# Altium PCB ScopeVideo.PcbDoc
Units mil, origin at the board's own origin, x right, y up, seen from the top; angles counter-clockwise.
Board outline 2000 x 1500 mil, 2 copper layers (Top Layer, Bottom Layer); 23 components, 10 nets, 55 pads, 3 vias.
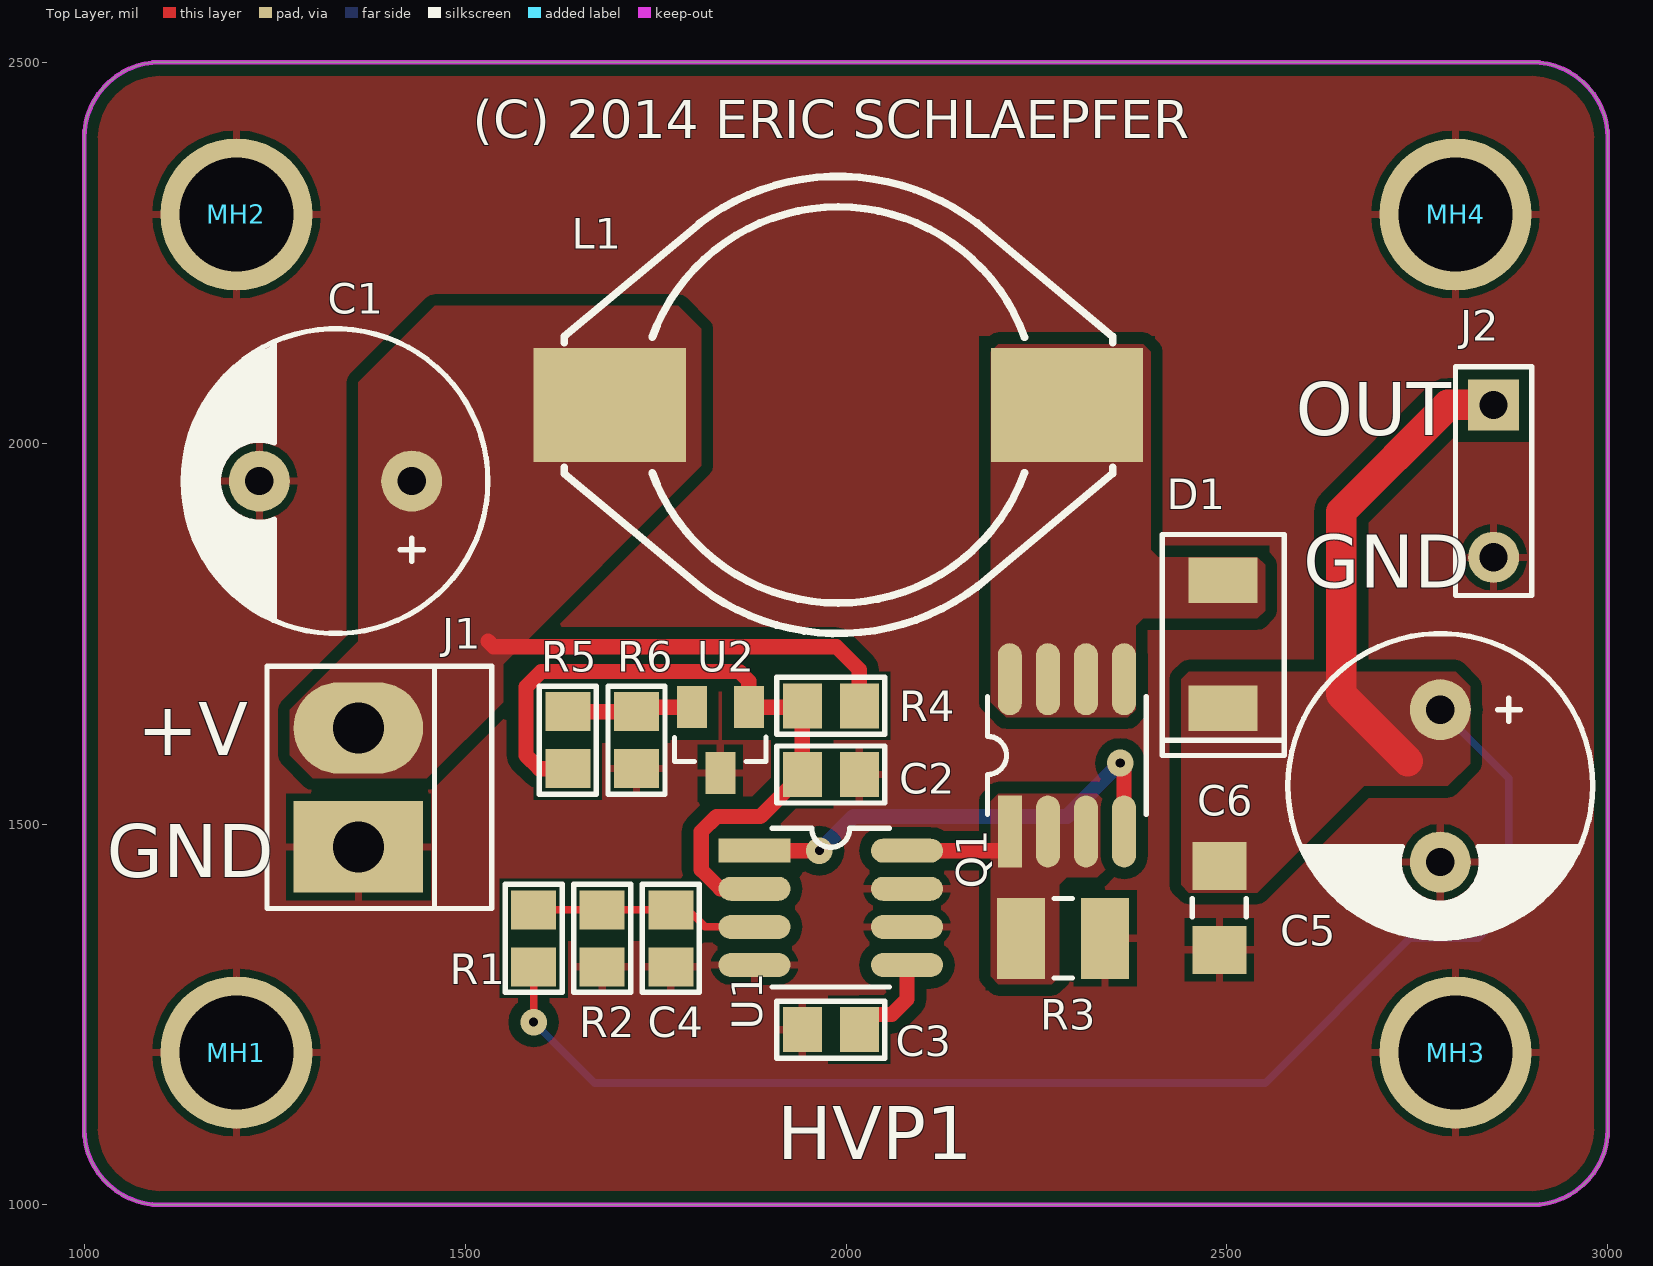
[diagram p0: Top Layer view]
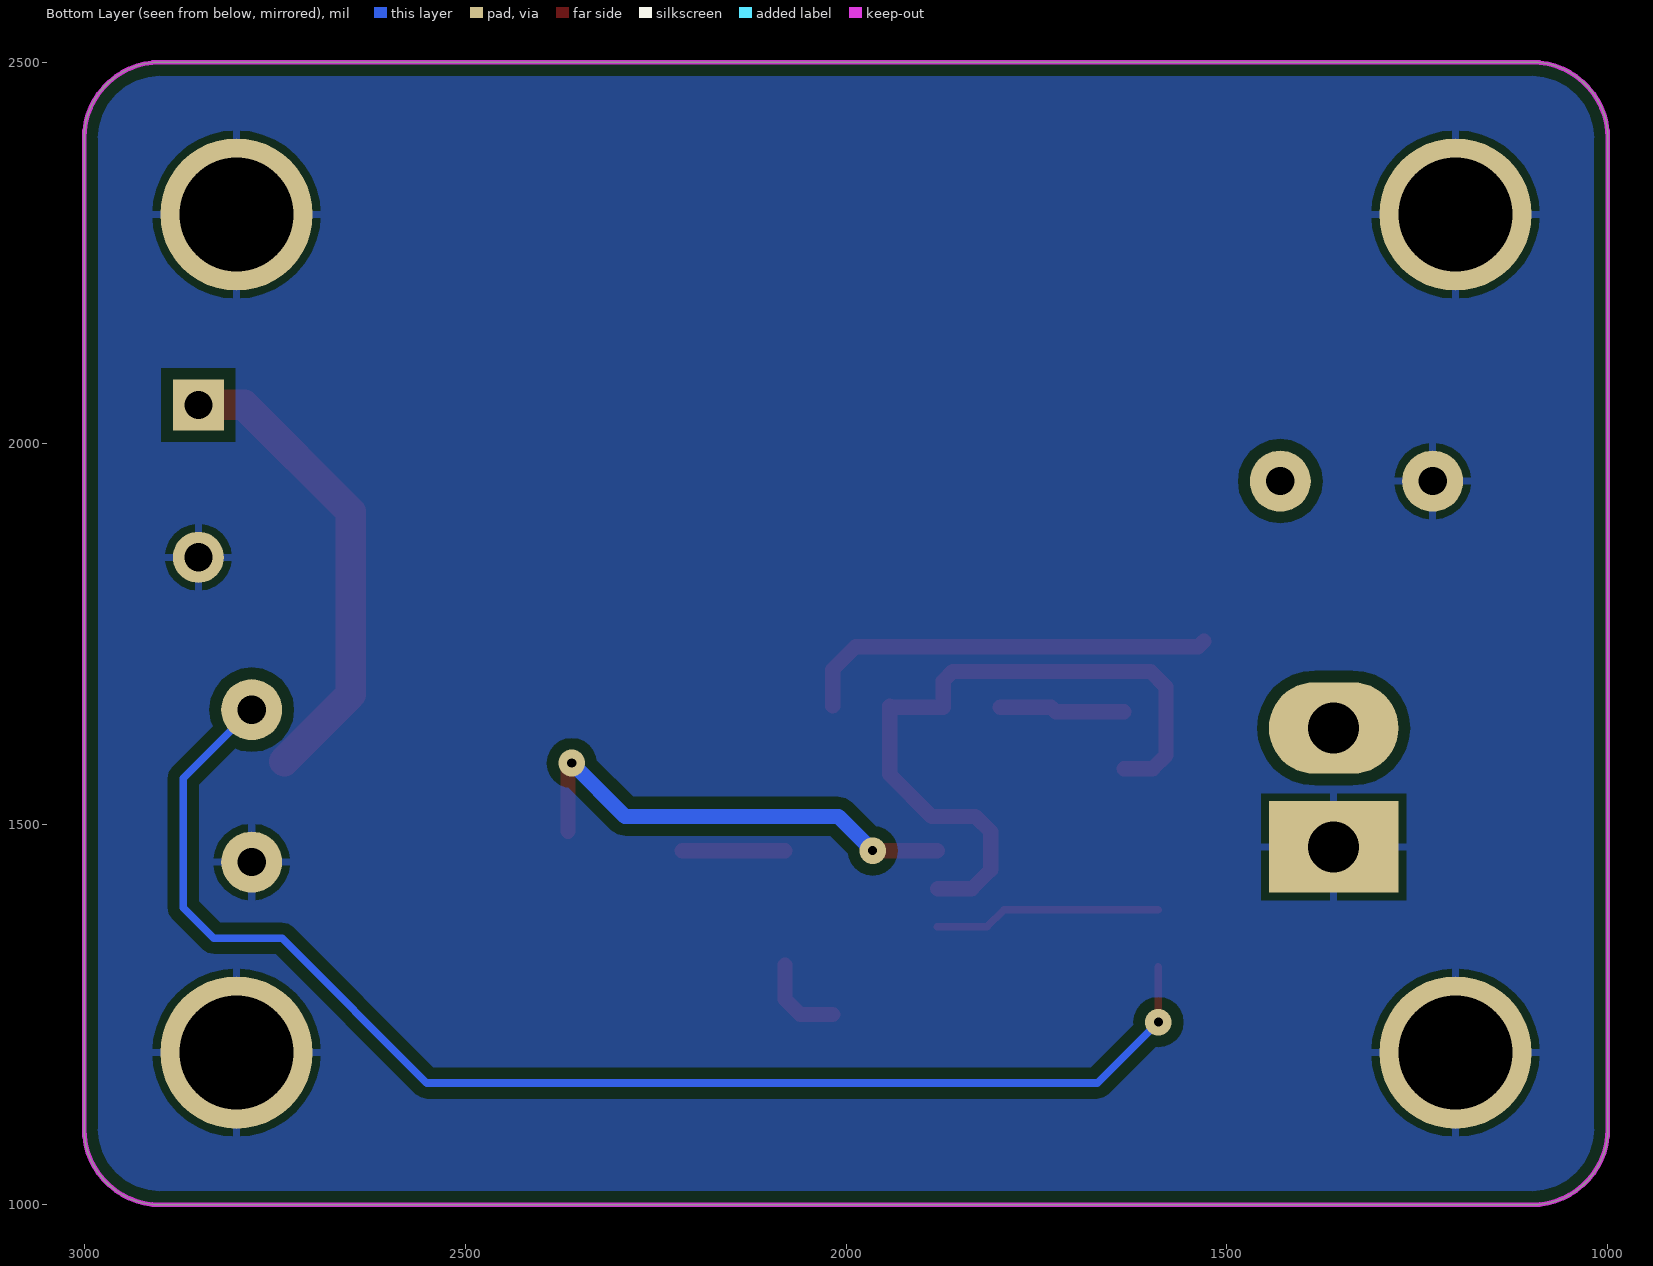
[diagram p1: Bottom Layer view, seen from below]

## Layer stack, top to bottom
Top Solder: solder mask 0.4, Solder Resist, Dk 3.5
Top Layer: signal copper 1.4
Dielectric 1: dielectric 12.6, FR-4, Dk 4.8
Bottom Layer: signal copper 1.4
Bottom Solder: solder mask 0.4, Solder Resist, Dk 3.5

## Board outline
1000,1100 1000,2400 cw(c1100,2400) 1100,2500 2900,2500 cw(c2900,2400) 3000,2400 3000,1100 cw(c2900,1100) 2900,1000 1100,1000 cw(c1100,1100) 1000,1100

## Design rules (kind name [scope] priority, off if disabled: settings)
Clearance [InPolygon] p1: gap=15
Clearance Clearance_1 [All] p2: gap=8
HoleSize [All] p1: absolutevalues=TRUE maxlimit=200 minlimit=12 maxpercent=80.000 minpercent=20.000
PolygonConnect PolygonConnect_1 [InNet('NetQ1_1') or InNet('NetD1_A') or InNet('NetC5_1') or InNet('NetC1_1')] p1: connectstyle=Direct reliefconductorwidth=10 reliefentries=4 polygonreliefangle="90 Angle" airgapwidth=10
PolygonConnect [All] p2: connectstyle=Relief reliefconductorwidth=10 reliefentries=4 polygonreliefangle="90 Angle" airgapwidth=10
RoutingVias [All] p1: holewidth=12 width=35 viastyle="Through Hole" minholewidth=12 minwidth=35 maxholewidth=28 maxwidth=50
SolderMaskExpansion [All] p1: expansion=4
Width [All] p1: maxlimit=100 minlimit=8 preferedwidth=10 minimp=50.000000 maximp=50.000000 favimp=50.000000
28 further rules are at their usual default settings.

## Classes and differential pairs
component class ScopeVideo: C1 C2 C3 C4 C5 C6 D1 J1 J2 L1 Q1 Q15 R1 R2 R3 R4 R5 R6 U1 U2

## Components (designator, comment, footprint, x,y, rotation, side; value= is the part's Value field where it differs from the comment)
C1 "Cap Pol2" CAP_R200x400 1330,1950 r180 top
C2 "Cap" G_0805[2012] 1980,1565 r180 top
C3 "Cap" G_0805[2012] 1980,1230 r0 top
C4 "Cap" G_0805[2012] 1770,1350 r90 top
C5 "TBD" CAP_R200x400 2780,1550 r270 top
C6 "Cap" G_1206[3216] 2490,1390 r90 top
D1 "MURA240T3G" G_SMB 2495,1820 r270 top
J1 "12V" HDR2S156 1360,1470 r180 top
J2 "OUT" HDR3SM1 2850,2050 r0 top
L1 "PM5022 68uH" IND1 1690,2050 r0 top
MH1 "Comment" M_MTHOLE 1200,1200 r0 top
MH2 "Comment" M_MTHOLE 1200,2300 r0 top
MH3 "Comment" M_MTHOLE 2800,1200 r0 top
MH4 "Comment" M_MTHOLE 2800,2300 r0 top
Q1 "SI4434DY-T1-E3" G_SO8 2290,1590 r90 top
R1 "Res1" G_0805[2012] 1590,1350 r90 top
R2 "Res1" G_0805[2012] 1680,1350 r270 top
R3 "Res1" G_1210[3225] 2285,1350 r0 top
R4 "Res1" G_0805[2012] 1980,1655 r180 top
R5 "Res1" G_0805[2012] 1635,1610 r90 top
R6 "Res1" G_0805[2012] 1725,1610 r270 top
U1 "MAX1771" G_SO8 1980,1390 r0 top
U2 "ZTL431A" G_SOT23 1835,1610 r180 top

## Footprints (in the part's own frame and the unit in brackets; to place one, negate y for a bottom-side part, rotate by r counter-clockwise, add the part's x,y. Pads: shape width x height; smd on the part's side, far side on the other; paste and mask are expansions set on the pad)
CAP_R200x400 [mil]
  round 80 hole 37: 1(-100,0) 2(100,0)
  silkscreen extent -200,-200 200,200, body extent -200,-200 200,200, height 800
G_0805[2012] [mm] "Generic 0805"
  rect 1.3x1.5 smd: 1(-0.95,0) 2(0.95,0)
  silkscreen extent -1.8,-0.95 1.8,0.95, body extent -1,-0.6 1,0.6
G_1206[3216] [mm] "Generic 1206"
  rect 1.6x1.8 smd: 1(-1.4,0) 2(1.4,0)
  silkscreen extent -0.3,-0.9 0.3,0.9, body extent -1.6,-0.8 1.6,0.8
G_1210[3225] [mm] "Generic 1210"
  rect 1.6x2.7 smd: 1(-1.4,0) 2(1.4,0)
  silkscreen extent -0.3,-1.33 0.3,1.33, body extent -1.61,-1.25 1.61,1.25
G_SMB [mm]
  rect 1.52x2.3 smd: A(0,0) K(4.27,0)
  silkscreen extent -1.52,-2.03 5.84,2.03
G_SO8 [mm]
  rect 2.4x0.8 smd: 1(-2.54,1.905)
  oval 2.4x0.8 smd: 2(-2.54,0.635) 3(-2.54,-0.635) 4(-2.54,-1.905) 5(2.54,-1.905) 6(2.54,-0.635) 7(2.54,0.635) 8(2.54,1.905)
  silkscreen extent -1.96,-2.64 1.96,2.65, body extent -2.03,-2.54 2.03,2.54
G_SOT23 [mm]
  rect 1x1.4 smd: 1(-0.95,-1.1) 2(0.95,-1.1) 3(0,1.1)
  silkscreen extent -1.52,-0.1 1.52,0.71, body extent -1.45,-0.64 1.45,0.64
HDR2S156 [mil]
  rect 170x120 hole 67: 1(0,0)
  oval 170x120 hole 67: 2(0,-156)
  silkscreen extent -175,-237 120,81, body extent -194,-231 200,75, height 585
HDR3SM1 [mil]
  rect 67x67 hole 37: 1(0,0)
  round 67 hole 37: 2(0,-200)
  silkscreen extent -50,-250 50,50
IND1 [mil]
  rect 200x150 smd: 1(0,0) 2(600,0)
  silkscreen extent -60,-300 660,300, body extent -60,-300 660,300
M_MTHOLE [mil]
  round 200 hole 150: 1(0,0)

## Part data
C1 C5: library part CapP, "Polarized Capacitor"
C2 C3 C4 C6: "Capacitor"
D1: library part "D Schottky", "Schottky Diode"
J1 J2: library part CON2, "Connector, 2 pin"
L1: library part INDUCTOR, "Inductor"
Q1: library part "MOSFET N SO8", "N-channel MOSFET (8-SOIC)"
R1 R2 R3 R4 R5 R6: library part Res, "Resistor"
U1: "MAX1771 Boost Converter"
U2: library part TL431, "Adjustable Shunt Reg"

## Via types
v1: diameter 35, hole 12, Top Layer to Bottom Layer, 3 vias

## Nets (pads, with @x,y where several pads share a name; then routed paths per layer and width w, separated by ;. In a path a pad name is that pad's centre, name@x,y a point inside that pad or via, vN(x,y) a via of type N, cw(c..) or ccw(c..) an arc to the next point about the centre after c; other vN are vias at no path point)
GND: C1.2 C2.1 C3.1 C4.1 C5.2 C6.1 J1.1 J2.2 MH1.1 MH2.1 MH3.1 MH4.1 R2.2 R3.2 R6.2 U1.4 U1.6 U1.7 U2.3
NetC1_1: C1.1 J1.2 L1.1 R4.1 | length 550.5
  Top Layer w20: 1530,1740 1537.4,1732.6 1987.4,1732.6 2017.4,1702.6 R4.1
NetC2_2: C2.2 R4.2 R5.1 U1.2 U2.1 | length 947.2
  Top Layer w20: R5.1 1597.4,1572.6 1580,1590 1580,1680 1600,1700 1860,1700 1872.4,1687.6 U2.1 1940.91,1653.31 R4.2 C2.2 1887.6,1510 1830,1510 1810,1490 1810,1440 1835,1415 U1.2
NetC3_2: C3.2 U1.5 | length 115.9
  Top Layer w20: C3.2@2017.4,1250 2060,1250 2080,1270 U1.5
NetC4_2: C4.2 R1.2 R2.1 U1.3 | length 299.3
  Top Layer w10: R1.2 R2.1 C4.2 1792.6,1387.4 1815,1365 U1.3
NetC5_1: C5.1 C6.2 D1.K J2.1 R1.1 | length 2400
  Top Layer w10: v1(1590,1240) R1.1
  Top Layer w40: 2737.5,1582.5 2650,1670 2650,1910 2790,2050 J2.1
  Bottom Layer w10: v1(1590,1240) 1670,1160 2550,1160 2740,1350 2830,1350 2870,1390 2870,1560 C5.1
NetD1_A: D1.A L1.2 Q1.5 Q1.6 Q1.7 Q1.8
NetQ1_1: Q1.1 Q1.2 Q1.3 R3.1 U1.8 | length 135
  Top Layer w20: U1.8 Q1.1@2215,1465
NetQ1_4: Q1.4 U1.1 | length 619.7
  Top Layer w20: U1.1 v1(1965,1465) ; v1(2360,1580) 2365,1575 Q1.4
  Bottom Layer w20: v1(1965,1465) 2010,1510 2290,1510 v1(2360,1580)
NetR5_2: R5.2 R6.1 U2.2 | length 165
  Top Layer w20: R5.2 R6.1 1730.91,1653.31 U2.2

## Polygon pours and split planes (outlines as drawn)
NetC5_1 on Top Layer "OUT" (solid, pour order 6): 2440,1420 2450,1410 2540,1410 2680,1550 2790,1550 2819.23,1579.23 2819.23,1680.77 2800,1700 2450,1700 2440,1690
GND on Top Layer "GND_TOP" (solid, pour order 10): 1000,2500 3000,2500 3000,1000 1000,1000 1000,2500
NetD1_A on Top Layer "FET_D" (solid, pour order 4): 2210,1640 2200,1650 2190,1660 2190,2110 2190,2120 2200,2130 2390,2130 2400,2120 2400,1860 2410,1850 2540,1850 2550,1840 2550,1780 2540,1770 2390,1770 2380,1760 2380,1650 2370,1640 2210,1640
NetQ1_1 on Top Layer "FET_S" (solid, pour order 2): 2200,1540 2190,1530 2190,1300 2200,1290 2270,1290 2280,1300 2280,1420 2290,1430 2330,1430 2340,1440 2340,1530 2330,1540
NetC1_1 on Top Layer "IN" (solid, pour order 8): 1360,2080 1360,1740 1270,1650 1270,1590 1300,1560 1450,1560 1550,1660 1550,1710 1810,1970 1810,2150 1780,2180 1460,2180
GND on Bottom Layer "GND_BOT" (solid, pour order 12): 1000,2500 1000,1000 3000,1000 3000,2500 1000,2500

## Keep-outs
Keep-Out Layer:
  the board outline again, w6

## Silkscreen, mask and mechanical layers (free items; w line width, h text height)
Top Overlay:
  text "(C) 2014 ERIC SCHLAEPFER" at 1510,2400 h50
  text "OUT" at 2590,2010 h70
  text "GND" at 2600,1810 h70
  text "+V" at 1070,1590 h70
  text "GND" at 1030,1430 h70
  text "HVP1" at 1910,1060 h70